# Altium PCB PCBDroneV2.PcbDoc
Units mil, origin at the board's own origin, x right, y up, seen from the top; angles counter-clockwise.
Board outline 6000 x 4000 mil, 2 copper layers (Top Layer, Bottom Layer); 56 components, 43 nets, 188 pads, 0 vias.
Unrouted connection lines stored in the file: 124.
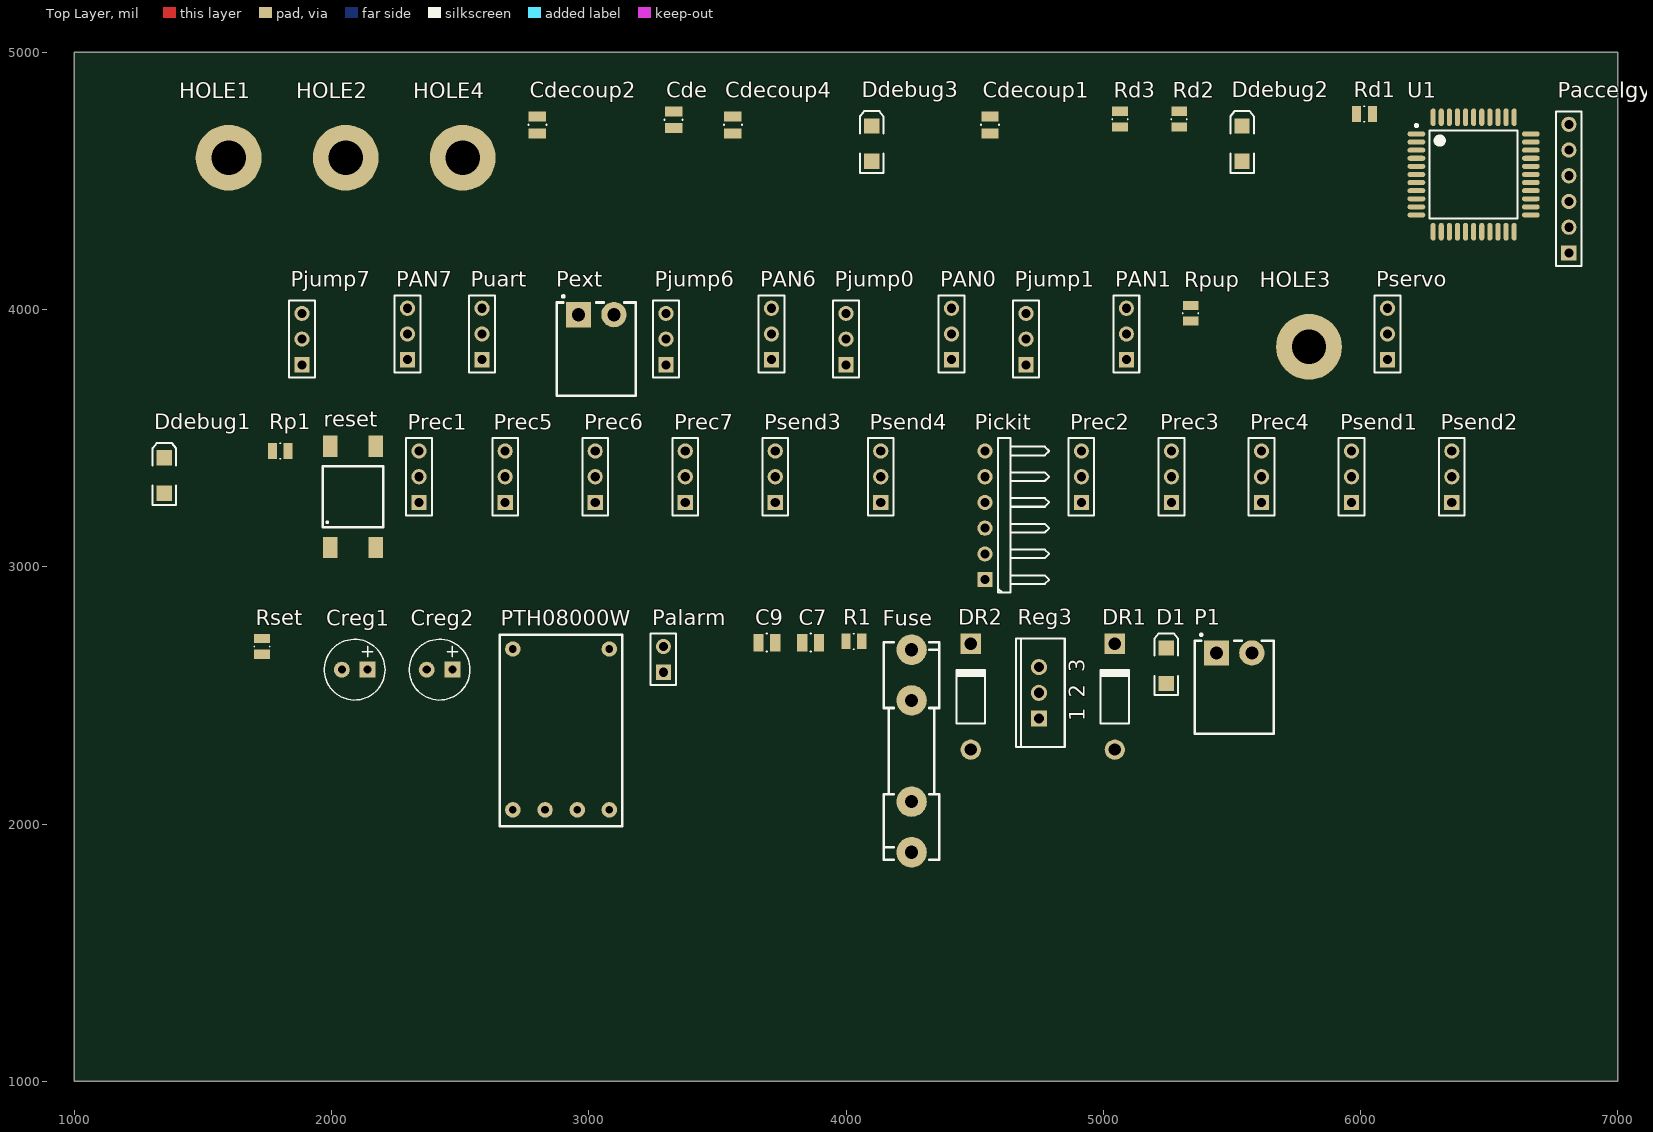
[diagram p0: Top Layer view]
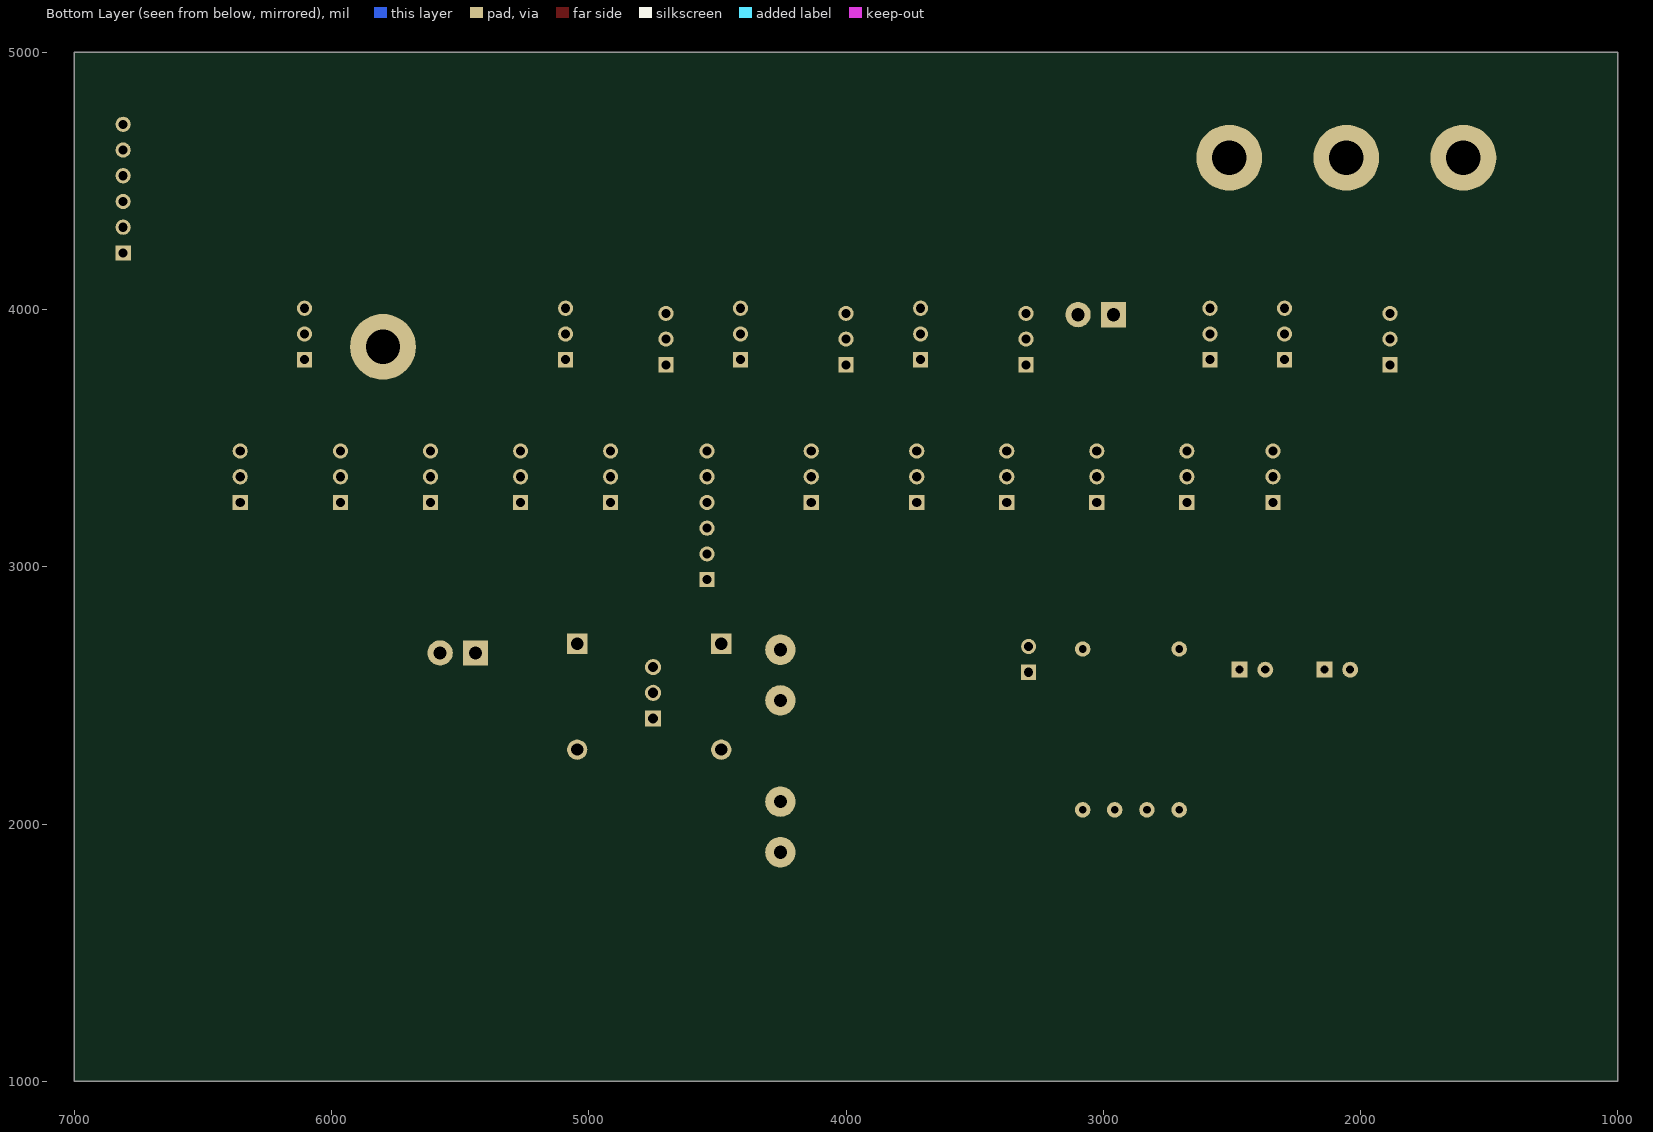
[diagram p1: Bottom Layer view, seen from below]

## Layer stack, top to bottom
Top Layer: signal copper 1.4
Dielectric: dielectric 12.6, FR-4, Dk 4.8
Bottom Layer: signal copper 1.4

## Board outline
1000,1000 7000,1000 7000,5000 1000,5000

## Design rules (kind name [scope] priority, off if disabled: settings)
Clearance [All] p1: gap=10
PolygonConnect [All] p1: connectstyle=Relief reliefconductorwidth=10 reliefentries=4 polygonreliefangle="90 Angle"
RoomDefinition DroneSch [InComponentClass('DroneSch')] p1: confinementstyle=ConfineIn formatcopy=TRUE lockcomponents=FALSE outline 1290,1405 6810,1405 6810,4165 1290,4165
RoomDefinition DroneRegul [InComponentClass('DroneRegul')] p2: confinementstyle=ConfineIn formatcopy=TRUE lockcomponents=FALSE outline 1360,1420 6190,1420 6190,3860 1360,3860
RoutingVias [All] p1: holewidth=28 width=50 viastyle="Through Hole" minholewidth=28 minwidth=50 maxholewidth=28 maxwidth=50
SilkscreenOverComponentPads [All] p1: minsilkscreentomaskgap=10
SolderMaskExpansion [All] p1: expansion=4
Width [All] p1: maxlimit=10 minlimit=10 preferedwidth=10
27 further rules are at their usual default settings.

## Classes and differential pairs
component class DroneSch: Cde Cdecoup1 Cdecoup2 Cdecoup4 Ddebug1 Ddebug2 Ddebug3 HOLE1 HOLE2 HOLE3 HOLE4 Paccelgyro PAN0 PAN1 PAN6 PAN7 Pext Pickit Pjump0 Pjump1 Pjump6 Pjump7 Prec1 Prec2 Prec3 Prec4 Prec5 Prec6 Prec7 Psend1 Psend2 Psend3 Psend4 Pservo Puart Rd1 Rd2 Rd3 reset Rp1 Rpup U1
component class DroneRegul: C7 C9 Creg1 Creg2 D1 DR1 DR2 Fuse P1 Palarm PTH08000W R1 Reg3 Rset

## Components (designator, comment, footprint, x,y, rotation, side; value= is the part's Value field where it differs from the comment)
C7 "CAP" C0805C 3830,2705 r0 top
C9 "CAP" C0805C 3660,2705 r0 top
Cde "CAP" C0805C 3330,4705 r90 top
Cdecoup1 "CAP" C0805C 4560,4685 r90 top
Cdecoup2 "CAP" C0805C 2800,4685 r90 top
Cdecoup4 "CAP" C0805C 3560,4685 r90 top
Creg1 "CAP Pol" RB.1/.3 2140,2600 r0 top
Creg2 "CAP Pol" RB.1/.3 2470,2600 r0 top
D1 "LED2" LED1206G 5245,2615 r90 top
Ddebug1 "LED" LED1206R 1350,3355 r90 top
Ddebug2 "LED" LED1206Y 5540,4645 r90 top
Ddebug3 "LED" LED1206G 4100,4645 r90 top
DR1 "Diode 1N4001" DO-41 5045,2495 r90 top
DR2 "Diode 1N4001" DO-41 4485,2495 r90 top
Fuse "200mA" "Fuse Holder 5x20mm" 4255,1890 r90 top
HOLE1 "Hole" SCREW 1600,4590 r0 top
HOLE2 "Hole" SCREW 2055,4590 r0 top
HOLE3 "Hole" SCREW 5800,3855 r0 top
HOLE4 "Hole" SCREW 2510,4590 r0 top
P1 "Batterie" TERM2W-3.5 5440,2665 r0 top
Paccelgyro "Header femelle" HDR1X6 6810,4220 r90 top
Palarm "alarme batterie faible" HDR1X2 3290,2590 r90 top
PAN0 "Header 3" HDR1X3 4410,3805 r90 top
PAN1 "Header 3" HDR1X3 5090,3805 r90 top
PAN6 "Header 3" HDR1X3 3710,3805 r90 top
PAN7 "Header 3" HDR1X3 2295,3805 r90 top
Pext "Header 2" TERM2W-3.5 2960,3980 r0 top
Pickit "PICkit" HDR1X6H 4540,2950 r90 top
Pjump0 "Header 3" HDR1X3 4000,3785 r90 top
Pjump1 "Header 3" HDR1X3 4700,3785 r90 top
Pjump6 "Header 3" HDR1X3 3300,3785 r90 top
Pjump7 "Header 3" HDR1X3 1885,3785 r90 top
Prec1 "Header bat" HDR1X3 2340,3250 r90 top
Prec2 "Header thro" HDR1X3 4915,3250 r90 top
Prec3 "Header aile" HDR1X3 5265,3250 r90 top
Prec4 "Header elev" HDR1X3 5615,3250 r90 top
Prec5 "Header rudd" HDR1X3 2675,3250 r90 top
Prec6 "Header gear" HDR1X3 3025,3250 r90 top
Prec7 "Header aux1" HDR1X3 3375,3250 r90 top
Psend1 "Header 3" HDR1X3 5965,3250 r90 top
Psend2 "Header 3" HDR1X3 6355,3250 r90 top
Psend3 "Header 3" HDR1X3 3725,3250 r90 top
Psend4 "Header 3" HDR1X3 4135,3250 r90 top
Pservo "Header 3" HDR1X3 6105,3805 r90 top
PTH08000W "Reg1" PTH08000W 2705,2055 r90 top
Puart "Header 3" HDR1X3 2585,3805 r90 top
R1 "RES" C0805R 4000,2710 r0 top
Rd1 "RES" C0805R 5985,4760 r0 top
Rd2 "RES" C0805R 5295,4710 r90 top
Rd3 "RES" C0805R 5065,4710 r90 top
Reg3 "LM2937IMP-3.3" TO-220-AB 4750,2510 r90 top
reset "SPST-NO" SPST-NO 1995,3075 r0 top
Rp1 "RES" C0805R 1770,3450 r0 top
Rpup "RES" C0805R 5340,3955 r90 top
Rset "RES" C0805R 1730,2660 r90 top
U1 "dsPIC33FJ64MC804-I/PT" TQFP-PT44_N 6440,4525 r0 top

## Footprints (in the part's own frame and the unit in brackets; to place one, negate y for a bottom-side part, rotate by r counter-clockwise, add the part's x,y. Pads: shape width x height; smd on the part's side, far side on the other; paste and mask are expansions set on the pad)
C0805C [mm]
  rect 1x1.7 smd: 1(0,0) 2(1.65,0)
  silkscreen extent 0.8,-0.89 0.85,0.89, body extent -0.21,-0.61 1.79,0.64, height 0.78
C0805R [mm]
  rect 0.9x1.55 smd: 1(0,0) 2(1.55,0)
  silkscreen extent 0.73,-0.76 0.81,0.76, body extent -0.24,-0.62 1.76,0.63, height 0.78
DO-41 [mm] "Diode, Axial; Body 5.2 x 2.7 mm (LxDia. max), Lead Dia. 0.86 mm (max)"
  round 2 hole 1.2: 1(-5.23,0)
  rect 2x2 hole 1.2: 2(5.23,0)
  silkscreen extent -2.65,-1.4 2.75,1.4
"Fuse Holder 5x20mm" [mm] "Schurter Fuse Holder 0751.0110"
  round 3 hole 1.3: 1(0,0) 1(5,0) 2(15,0) 2(20,0)
  silkscreen extent -0.75,-2.75 20.75,2.75, body extent -0.51,-3.1 20.58,3.1, height 9.86
HDR1X2 [mm] "Connector; Header; 2 Position"
  rect 1.5x1.5 hole 0.9: 1(0,0)
  round 1.5 hole 0.9: 2(2.54,0)
  silkscreen extent -1.27,-1.27 3.81,1.27, body extent -1.17,-1.25 3.91,1.25, height 8.2
HDR1X3 [mm] "Connector; Header; 3 Position"
  rect 1.5x1.5 hole 0.9: 1(0,0)
  round 1.5 hole 0.9: 2(2.54,0) 3(5.08,0)
  silkscreen extent -1.27,-1.27 6.35,1.27, body extent -1.17,-1.25 6.45,1.25, height 8.2
HDR1X6 [mm] "Connector; Header; 6 Position"
  rect 1.5x1.5 hole 0.9: 1(0,0)
  round 1.5 hole 0.9: 2(2.54,0) 3(5.08,0) 4(7.62,0) 5(10.16,0) 6(12.7,0)
  silkscreen extent -1.27,-1.27 13.97,1.27, body extent -1.17,-1.25 14.07,1.25, height 8.2
HDR1X6H [mm] "Connector; Header; 6 Position; Right Angle"
  rect 1.5x1.5 hole 0.9: 1(0,0)
  round 1.5 hole 0.9: 2(2.54,0) 3(5.08,0) 4(7.62,0) 5(10.16,0) 6(12.7,0)
  silkscreen extent -1.27,-6.35 13.97,-1.27, body extent -1.17,-5.85 13.87,1.25, height 5.42
LED1206G [mm] "SMT LED; 2 Flat Leads; 3.2X1.6X1.1"
  rect 1.5x1.5 smd: 1(-1.75,0) 2(1.75,0)
  silkscreen extent -2.9,-1.15 3.2,1.15, body extent -1.6,-0.8 1.6,0.8, height 1.11
LED1206R [mm] "SMT LED; 2 Flat Leads; 3.2X1.6X1.1"
  rect 1.5x1.5 smd: 1(-1.75,0) 2(1.75,0)
  silkscreen extent -2.9,-1.15 3.2,1.15, body extent -1.6,-0.8 1.6,0.8, height 1.11
LED1206Y [mm] "SMT LED; 2 Flat Leads; 3.2X1.6X1.1"
  rect 1.5x1.5 smd: 1(-1.75,0) 2(1.75,0)
  silkscreen extent -2.9,-1.15 3.2,1.15, body extent -1.6,-0.8 1.6,0.8, height 1.11
PTH08000W [mil]
  round 60 hole 30: 1(0,0) 2(0,-125.2) 3(0,-250.39) 4(0,-374.8) 5(625.2,-374.8) 6(625.2,0)
  silkscreen extent -63,-425 681,51
RB.1/.3 [mil]
  rect 62x62 hole 31.5: 1(0,0)
  round 62 hole 31.5: 2(-100,0)
  silkscreen extent -168,-118 68,118
SCREW [mm] "Mounting Hole M3"
  round 6.5 hole 3.4: 1(0,0)
  body extent -2.89,-2.52 2.89,2.52, height 10
SPST-NO [mm] "Tactile Switch SPST-NO 6x6mm"
  rect 1.4x2.1 smd: 1(0,0) 2(4.5,0) 3(4.5,10) 4(0,10)
  silkscreen extent -0.75,2 5.25,8, body extent -0.75,0.93 5.25,9.08, height 5
TERM2W-3.5 [mm] "Horizontal Terminal Block, 2 ways, 3.5mm; Model 20.155MH/2"
  rect 2.5x2.5 hole 1.3: 1(0,0)
  round 2.5 hole 1.3: 2(3.5,0)
  silkscreen extent -2.15,-8 5.65,1.9, body extent -2.45,-8 5.95,1.2, height 7.25
TO-220-AB [mm] "TO, Thru-Hole, Vertical, Heatsink Mounted; 3 In-Line Leads; Pitch 2.54 mm"
  rect 1.6x1.6 hole 1: 1(-2.54,0)
  round 1.6 hole 1: 2(0,0) 3(2.54,0)
  silkscreen extent -5.35,-2.55 5.35,2.25
TQFP-PT44_N [mm] "Thin QFP, 44-Leads, Body 10x10mm, Pitch 0.8mm, IPC Medium Density"
  oval 1.75x0.5 smd: 1(-5.65,4) 2(-5.65,3.2) 3(-5.65,2.4) 4(-5.65,1.6) 5(-5.65,0.8) 6(-5.65,0) 7(-5.65,-0.8) 8(-5.65,-1.6) 9(-5.65,-2.4) 10(-5.65,-3.2) 11(-5.65,-4) 23(5.65,-4) 24(5.65,-3.2) 25(5.65,-2.4) 26(5.65,-1.6) 27(5.65,-0.8) 28(5.65,0) 29(5.65,0.8) 30(5.65,1.6) 31(5.65,2.4) 32(5.65,3.2) 33(5.65,4)
  oval 0.5x1.75 smd: 12(-4,-5.65) 13(-3.2,-5.65) 14(-2.4,-5.65) 15(-1.6,-5.65) 16(-0.8,-5.65) 17(0,-5.65) 18(0.8,-5.65) 19(1.6,-5.65) 20(2.4,-5.65) 21(3.2,-5.65) 22(4,-5.65) 34(4,5.65) 35(3.2,5.65) 36(2.4,5.65) 37(1.6,5.65) 38(0.8,5.65) 39(0,5.65) 40(-0.8,5.65) 41(-1.6,5.65) 42(-2.4,5.65) 43(-3.2,5.65) 44(-4,5.65)
  silkscreen extent -5.77,-4.35 4.35,4.95, body extent -6,-6 6,6, height 1.05

## Part data
C7 C9 Cde Cdecoup1 Cdecoup2 Cdecoup4: "Capacitor"
Creg1 Creg2: "Polarized Capacitor"
D1: "Typical RED, GREEN, YELLOW, AMBER GaAs LED"
Ddebug1 Ddebug2 Ddebug3: "Typical LED"
DR1 DR2: "1 Amp General Purpose Rectifier"
Fuse: library part Fuse, "Standard Fuse Holder"
HOLE1 HOLE2 HOLE3 HOLE4: "Mounting Hole for screws"
P1 Palarm: library part "Header 2", "Header, 2-Pin"
Paccelgyro: library part "Header 6", "Header, 6-Pin"
PAN0 PAN1 PAN6 PAN7 Pjump0 Pjump1 Pjump6 Pjump7 Psend1 Psend2 Psend3 Psend4 Pservo Puart: "Header, 3-Pin"
Pext: "Header, 2-Pin"
Pickit: library part "Header ICSP", "Header, 6-Pin, Right Angle"
Prec1 Prec2 Prec3 Prec4 Prec5 Prec6 Prec7: library part "Header 3", "Header, 3-Pin"
PTH08000W: library part PTH08000W
R1 Rd1 Rd2 Rd3 Rp1 Rpup Rset: "Resistor"
Reg3: "500 mA Low Dropout Regulator"
reset: "Tactile Switch 7.3mm, SMD"
U1: "High-Performance 16-bit Digital Signal Controller, 64 KB Flash, 16 KB RAM, 44-Pin TQFP, Industrial Temperature"

## Nets (pads, with @x,y where several pads share a name; then routed paths per layer and width w, separated by ;. In a path a pad name is that pad's centre, name@x,y a point inside that pad or via, vN(x,y) a via of type N, cw(c..) or ccw(c..) an arc to the next point about the centre after c; other vN are vias at no path point)
3V3: C7.2 Cde.2 Cdecoup2.2 Cdecoup4.2 D1.1 Paccelgyro.6 Pickit.2 Pjump0.1 Pjump1.1 Pjump6.1 Pjump7.1 Reg3.3 Rp1.2 U1.17 U1.28 U1.40
5V: C9.1 Creg2.1 Pext.1 Pjump0.3 Pjump1.3 Pjump6.3 Pjump7.3 Prec1.2 Prec2.2 Prec3.2 Prec4.2 Prec5.2 Prec6.2 Prec7.2 Pservo.2 PTH08000W.6 Reg3.1 Rpup.2
AN0: PAN0.1 U1.19
AN1: PAN1.1 U1.20
AN6: PAN6.1 U1.25
AN7: PAN7.1 U1.26
BAT: Creg1.1 Fuse.2 PTH08000W.3
GND: C7.1 C9.2 Cde.1 Cdecoup1.1 Cdecoup2.1 Cdecoup4.1 Creg1.2 Creg2.2 Ddebug1.2 Ddebug2.2 Ddebug3.2 P1.1 Paccelgyro.5 Palarm.2 PAN0.3 PAN1.3 PAN6.3 PAN7.3 Pext.2 Pickit.3 Prec1.3 Prec2.3 Prec3.3 Prec4.3 Prec5.3 Prec6.3 Prec7.3 Psend1.3 Psend2.3 Psend3.3 Psend4.3 Pservo.3 PTH08000W.1 Puart.3 R1.1 Reg3.2 reset.1 reset.4 Rset.2 U1.6 U1.16 U1.29 U1.39
I2CSCL: Paccelgyro.3 U1.44
I2CSDA: Paccelgyro.4 U1.1
ICAILE: Prec3.1 U1.42
ICAUX1: Prec7.1 U1.38
ICELEV: Prec4.1 U1.43
ICGEAR: Prec6.1 U1.37
ICRUDD: Prec5.1 U1.36
ICTHRO: Prec2.1 U1.41
INT0ACCEL: Paccelgyro.1 U1.15
INT1ACCEL: Paccelgyro.2 U1.14
MCLR: Pickit.1 reset.2 reset.3 Rp1.1 U1.18
NetCdecoup1_2: Cdecoup1.2 U1.7
NetD1_2: D1.2 R1.2
NetDdebug1_1: Ddebug1.1 Rd1.2
NetDdebug2_1: Ddebug2.1 Rd2.2
NetDdebug3_1: Ddebug3.1 Rd3.2
NetDR1_1: DR1.1 DR2.1 P1.2 Palarm.1
NetDR1_2: DR1.2 DR2.2 Fuse.1
NetPAN0_2: PAN0.2 Pjump0.2
NetPAN1_2: PAN1.2 Pjump1.2
NetPAN6_2: PAN6.2 Pjump6.2
NetPAN7_2: PAN7.2 Pjump7.2
NetPTH08000W_5: PTH08000W.5 Rset.1
NetRd1_1: Rd1.1 U1.30
NetRd2_1: Rd2.1 U1.31
NetRd3_1: Rd3.1 U1.34
PGC1: Pickit.5 U1.22
PGD1: Pickit.4 U1.21
PWM1: Psend1.1 U1.8
PWM2: Psend2.1 U1.9
PWM3: Psend3.1 U1.10
PWM4: Psend4.1 U1.11
PWMSERVO: Pservo.1 Rpup.1 U1.3
RX: Puart.2 U1.4
TX: Puart.1 U1.5
pads on no net: HOLE1.1 HOLE2.1 HOLE3.1 HOLE4.1 Pickit.6 Prec1.1 Psend1.2 Psend2.2 Psend3.2 Psend4.2 PTH08000W.2 PTH08000W.4 U1.2 U1.12 U1.13 U1.23 U1.24 U1.27 U1.32 U1.33 U1.35

## Text inside footprints (layer, text, board x,y; h text height)
Reg3: Top Overlay "1" at 4928.15,2400.16 h59.06 r90; Top Overlay "2" at 4928.15,2490.32 h59.06 r90; Top Overlay "3" at 4928.15,2590.32 h59.06 r90